# Altium PCB EthernetSwitchBoard.PcbDoc (part 2 of 2)
Units mil, origin at the board's own origin, x right, y up, seen from the top; angles counter-clockwise.
Board outline 5250 x 2500 mil, 4 copper layers (Top Layer, Ground Plane, Power Plane, Bottom Layer), stack 30.634 mil thick; 145 components, 168 nets, 574 pads, 171 vias.
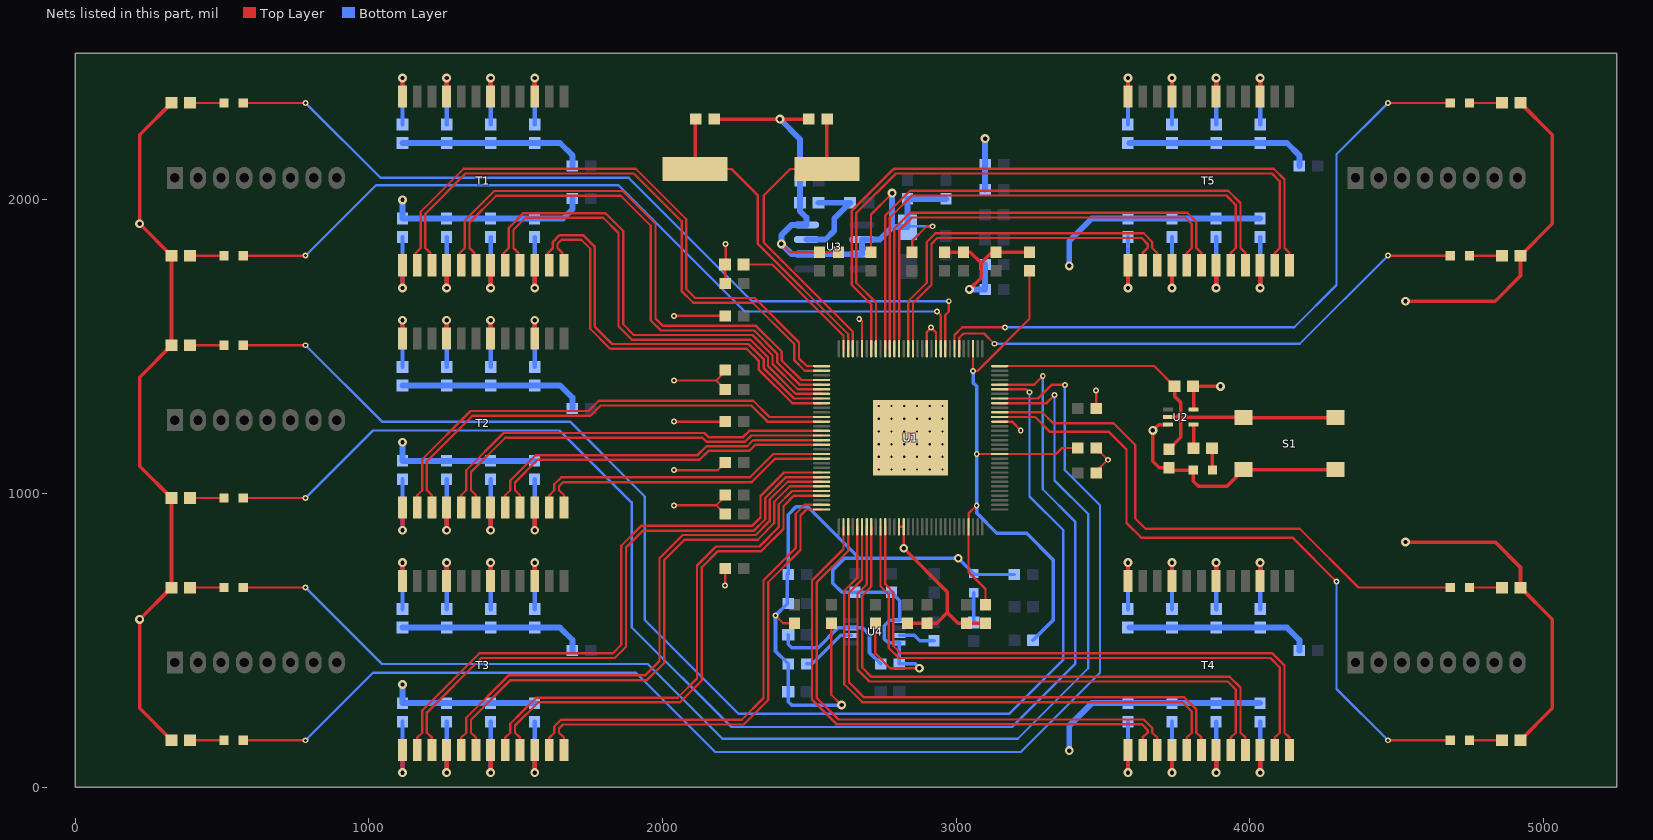
[diagram p4: the nets of this part, all layers, seen from the top]

## Via types
v1: diameter 30, hole 15, Top Layer to Bottom Layer, 75 vias
v2: diameter 20, hole 10, Top Layer to Bottom Layer, 56 vias
v3: diameter 19.68, hole 7.87, Top Layer to Bottom Layer, 36 vias
v4: diameter 200, hole 125, Top Layer to Bottom Layer, 4 vias

## Nets (pads, with @x,y where several pads share a name; then routed paths per layer and width w, separated by ;. In a path a pad name is that pad's centre, name@x,y a point inside that pad or via, vN(x,y) a via of type N, cw(c..) or ccw(c..) an arc to the next point about the centre after c; other vN are vias at no path point) (continued)
GND: C1.2 C2.2 C3.2 C4.1 C5.1 C6.1 C7.1 C8.1 C9.1 C10.1 C11.1 C14.1 C15.1 C16.1 C17.1 C18.1 C19.1 C20.1 C21.1 C22.1 C25.1 C26.1 C27.1 C28.1 C30.2 C31.2 C32.2 C33.2 C34.2 C35.2 C36.2 C37.2 C38.2 C39.2 C40.2 C41.2 C42.2 C43.2 C44.2 C45.2 C46.2 C47.2 C48.2 C49.2 C50.2 C51.2 C52.2 C53.2 C54.2 C55.2 C56.2 C57.2 C58.2 C59.2 C60.2 C61.2 C63.2 C64.2 C65.2 C66.2 C67.2 C68.2 C69.2 C70.2 C71.2 D1.A LED1.C LED12.C R3.1 R38.1 R39.2 S1.A U1.46 U1.47 U1.84 U1.107 U1.109 U1.123 U1.129 U2.3 U3.2 U3.4 U3.6 U3.7 U4.5 U4.8 | length 12734.5
  Top Layer w8: v2(2040,960) 2183.5,960 ; v2(2040,1080) 2188.5,1080 C35.2@2213.5,1105 ; v2(2040,1245) C36.2@2213.5,1245 ; v2(2040,1385) 2183.5,1385 ; v2(2040,1605) C37.2@2213.5,1605 ; v2(2213.5,686.5) C34.2@2213.5,745 ; C58.2@2213.5,930 2183.5,960 ; C47.2@2213.5,995 2213.5,990 2183.5,960 ; C59.2@2213.5,1355 2183.5,1385 ; C48.2@2213.5,1420 2213.5,1415 2183.5,1385 ; C49.2@2213.5,1715 R3.1@2213.5,1780 2215,1781.5 v2(2215,1850) ; v2(2385,585) 2411.5,558.5 C46.2@2450,558.5 ; v1(2405,1850) 2433.5,1821.5 C38.2@2535,1821.5 C50.2@2600,1821.5 ; C33.2@2575,558.5 2575,315 v1(2610,280) ; v2(2670,1595) 2679.65,1585.35 U1.123@2679.65,1493.15 ; C39.2@2710,1821.5 2710,1950 v1@2782.5,2022.5 ; C32.2@2725,558.5 2725,455 2775,405 v1(2875,405) ; U1.46@2805.63,886.85 U1.47@2821.38,886.85 v1(2821.38,813.62) ; C40.2@2850,1821.5 2850,1860 2900,1910 v2(2920,1910) ; U1.109@2900.12,1493.15 2900.12,1550.12 v2(2915,1565) 2931.61,1548.39 U1.107@2931.61,1493.15 ; U1.84@3148.15,1245.12 3189.88,1245.12 v2(3220,1215) ; C55.2@3476.5,1070 3476.5,1075 v2(3516.5,1115) C42.2@3476.5,1155 ; C54.2@3476.5,1290 v2(3476.5,1351.5)
  Top Layer w12: C3.2@2176.5,2275 v1(2400,2275) C2.2@2498.5,2275 ; v1(2821.38,813.62) 2970,665 2970,595 ; C45.2@2835,558.5 C57.2@2900,558.5 2933.5,558.5 2970,595 ; C51.2@2960,1821.5 C60.2@3025,1821.5 3048.5,1821.5 3085,1785 ; v1(3045,1695) 3085,1735 3085,1785 ; C43.2@3100,558.5 C56.2@3035,558.5 3006.5,558.5 2970,595 ; C41.2@3250,1821.5 C61.2@3135,1821.5 3121.5,1821.5 3085,1785 ; U2.3@3721.69,1234.41 3689.41,1234.41 v1(3670,1215) 3670,1110 3691.5,1088.5 C1.2@3725,1088.5 ; C1.2@3733.5,1080 LED1.C@3807.52,1080 3807.52,1042.48 3825,1025 3922.09,1025 S1.A@3978.5,1081.42 S1.A@4291.5,1081.42
  Bottom Layer w8: D1.A@2838,1910 v2(2920,1910)
  Bottom Layer w10: LED12.C@3062.48,725 C44.2@3198.5,725
  Bottom Layer w12: C69.2@2425,725 2425,625 v2(2385,585) 2385,463.5 C71.2@2428.5,420 R39.2@2428.5,325 2428.5,291.5 2440,280 v1(2610,280) ; C69.2@2428.5,725 2428.5,928.5 2455,955 2495,955 2670,780 ; U4.8@2806.5,490.22 C70.2@2806.5,420 2860,420 v1(2875,405) ; U4.8@2807.89,491.61 2768.39,491.61 2755,505 2755,550 2773.39,568.39 U4.5@2807.89,568.39 2807.89,635.61 C64.2@2780,663.5 C63.2@2655,663.5 2611.5,663.5 2580,695 2580,740 2620,780 2670,780 ; LED12.C@3060,727.48 v1(3007.48,780) 2670,780
  Bottom Layer w20: v1(1115,350) C15.1@1115,286.5 C17.1@1265,286.5 C19.1@1415,286.5 C21.1@1565,286.5 ; v1(1115,1175) C5.1@1115,1111.5 C7.1@1265,1111.5 C9.1@1415,1111.5 C11.1@1565,1111.5 ; v1(1115,2000) C4.1@1115,1936.5 C6.1@1265,1936.5 C8.1@1415,1936.5 C10.1@1565,1936.5 1661.5,1936.5 1693.5,1968.5 C14.1@1693.5,2005 ; v1(2400,2275) 2468.5,2206.5 C65.2@2468.5,2065 2468.5,1961.5 2490,1940 U3.4@2490,1915.51 ; U3.4@2490.51,1915 2440,1915 2405,1880 v1(2405,1850) 2440,1815 U3.2@2490.51,1815 U3.7@2679.49,1815 U3.6@2679.49,1865 2740,1865 2782,1907 ; v1(2782,2023) 2782,1907 ; C66.2@2965,2003.5 C67.2@2835,2003.5 D1.A@2835,1907 2782,1907 ; v1(3045,1695) C30.2@3098.5,1695 C31.2@3098.5,1780 ; C52.2@3098.5,2035 C53.2@3098.5,2120 v1(3098.5,2208.5) ; v1(3385,125) 3385,210 3461.5,286.5 C16.1@3585,286.5 C18.1@3735,286.5 C20.1@3885,286.5 C22.1@4035,286.5 ; v1(3385,1775) 3385,1860 3461.5,1936.5 C25.1@3585,1936.5 C26.1@3735,1936.5 C27.1@3885,1936.5 C28.1@4035,1936.5
  other v3: 2736.73,1081.73 2780.04,1081.73 2823.35,1081.73 2866.65,1081.73 2909.96,1081.73 2953.27,1081.73 2736.73,1125.04 2780.04,1125.04 2823.35,1125.04 2866.65,1125.04 2909.96,1125.04 2953.27,1125.04 2736.73,1168.35 2780.04,1168.35 2823.35,1168.35 2866.65,1168.35 2909.96,1168.35 2953.27,1168.35 2736.73,1211.65 2780.04,1211.65 2823.35,1211.65 2866.65,1211.65 2909.96,1211.65 2953.27,1211.65 2736.73,1254.96 2780.04,1254.96 2823.35,1254.96 2866.65,1254.96 2909.96,1254.96 2953.27,1254.96 2736.73,1298.27 2780.04,1298.27 2823.35,1298.27 2866.65,1298.27 2909.96,1298.27 2953.27,1298.27
ISET: R3.2 U1.127 | length 484.7
  Top Layer w8: R3.2@2276.5,1780 2373.79,1780 2616.65,1537.13 U1.127@2616.65,1493.15
KSZ_RESET_N: C1.1 R1.1 S1.B U1.96 U2.2 | length 1443.8
  Top Layer w8: U1.96@3148.15,1434.09 3674.41,1434.09 R1.1@3743.5,1365
  Top Layer w12: U2.2@3721.69,1260 3750,1260 ; C1.1@3725,1151.5 3765,1191.5 3765,1245 3750,1260 ; R1.1@3743.5,1365 3743.5,1331.5 3765,1310 3765,1275 3750,1260 ; S1.B@3977.09,1260 3750,1260 ; S1.B@3978.5,1258.58 S1.B@4291.5,1258.58
LED1_0: LED2.C U1.105 | length 2848.9
  Top Layer w8: LED2.C@572.48,2330 v2(785,2330) ; U1.105@2963.11,1493.15 2963.11,1608.11 2975,1620 v2(2975,1655)
  Bottom Layer w8: v2(785,2330) 1040,2075 1885,2075 2305,1655 v2(2975,1655)
LED1_1: LED4.C U1.106 | length 2772
  Top Layer w8: LED4.C@572.48,1810 v2(785,1810) ; v2(2935,1620) 2947.36,1607.64 U1.106@2947.36,1493.15
  Bottom Layer w8: v2(785,1810) 1025,2050 1850,2050 2280,1620 v2(2935,1620)
LED2_0: LED3.C U1.91 | length 4698.8
  Top Layer w8: LED3.C@572.48,1505 v2(785,1505) ; U1.91@3148.15,1355.35 3239.65,1355.35 v2(3250,1345)
  Bottom Layer w8: v2(785,1505) 1045,1245 1685,1245 1940,990 1940,570 2260,250 3180,250 3365,435 3365,875 3250,990 v2(3250,1345)
LED2_1: LED5.C U1.92 | length 4868.5
  Top Layer w8: LED5.C@572.48,985 v2(785,985) ; U1.92@3148.15,1371.1 3266.1,1371.1 v2(3295,1400)
  Bottom Layer w8: v2(785,985) 1015,1215 1650,1215 1895,970 1895,545 2235,205 3190,205 3405,420 3405,905 3295,1015 v2(3295,1400)
LED3_0: LED6.C U1.88 | length 4365.9
  Top Layer w8: LED6.C@572.48,680 v2(785,680) ; U1.88@3148.15,1308.11 3308.11,1308.11 v2(3335,1335)
  Bottom Layer w8: v2(785,680) 1045,420 1950,420 2205,165 3210,165 3450,405 3450,930 3335,1045 v2(3335,1335)
LED3_1: LED8.C U1.89 | length 4507.1
  Top Layer w8: LED8.C@572.48,160 v2(785,160) ; U1.89@3148.15,1323.86 3278.86,1323.86 3325,1370 v2(3370,1370)
  Bottom Layer w8: v2(785,160) 1015,390 1910,390 2180,120 3220,120 3490,390 3490,960 3370,1080 v2(3370,1370)
LED4_0: LED7.C U1.85 | length 2350.6
  Top Layer w8: U1.85@3148.15,1260.87 3269.13,1260.87 3320,1210 3520,1210 3580,1150 3580,900 3630,850 4145,850 v2(4295,700) ; v2(4470,160) LED7.C@4682.52,160
  Bottom Layer w8: v2(4295,700) 4295,335 v2(4470,160)
LED4_1: LED9.C U1.86 | length 1927.9
  Top Layer w8: U1.86@3148.15,1276.61 3293.39,1276.61 3330,1240 3535,1240 3610,1165 3610,915 3645,880 4170,880 4370,680 LED9.C@4682.52,680
LED5_0: LED10.C U1.102 | length 1854.2
  Top Layer w8: U1.102@3010.35,1493.15 3010.35,1530.35 3025,1545 3095,1545 v2(3130,1510) ; v2(4470,1810) LED10.C@4682.52,1810
  Bottom Layer w8: v2(3130,1510) 4170,1510 v2(4470,1810)
LED5_1: LED11.C U1.103 | length 2322.4
  Top Layer w8: U1.103@2994.61,1493.15 2994.61,1539.61 3021,1566 v2(3166,1566) ; v2(4470,2330) LED11.C@4682.52,2330
  Bottom Layer w8: v2(3166,1566) 4151,1566 4295,1710 4295,2155 v2(4470,2330)
NetC4_2: C4.2 T1.1 | length 250.9
  Top Layer w15: v1(1115,1700) T1.1@1115,1777.4
  Bottom Layer w15: v1(1115,1700) C4.2@1115,1873.5
NetC5_2: C5.2 T2.1 | length 250.9
  Top Layer w15: v1(1115,875) T2.1@1115,952.4
  Bottom Layer w15: v1(1115,875) C5.2@1115,1048.5
NetC6_2: C6.2 T1.4 | length 250.9
  Top Layer w15: v1(1265,1700) T1.4@1265,1777.4
  Bottom Layer w15: v1(1265,1700) C6.2@1265,1873.5
NetC7_2: C7.2 T2.4 | length 250.9
  Top Layer w15: v1(1265,875) T2.4@1265,952.4
  Bottom Layer w15: v1(1265,875) C7.2@1265,1048.5
NetC8_2: C8.2 T1.7 | length 250.9
  Top Layer w15: v1(1415,1700) T1.7@1415,1777.4
  Bottom Layer w15: v1(1415,1700) C8.2@1415,1873.5
NetC9_2: C9.2 T2.7 | length 250.9
  Top Layer w15: v1(1415,875) T2.7@1415,952.4
  Bottom Layer w15: v1(1415,875) C9.2@1415,1048.5
NetC10_2: C10.2 T1.10 | length 250.9
  Top Layer w15: v1(1565,1700) T1.10@1565,1777.4
  Bottom Layer w15: v1(1565,1700) C10.2@1565,1873.5
NetC11_2: C11.2 T2.10 | length 250.9
  Top Layer w15: v1(1565,875) T2.10@1565,952.4
  Bottom Layer w15: v1(1565,875) C11.2@1565,1048.5
NetC12_2: C12.2 R6.2 R8.2 R10.2 R12.2 | length 632.4
  Bottom Layer w20: R6.2@1115,2193.5 R8.2@1265,2193.5 R10.2@1415,2193.5 R12.2@1565,2193.5 1651.5,2193.5 1693.5,2151.5 C12.2@1693.5,2115
NetC13_2: C13.2 R7.2 R9.2 R11.2 R13.2 | length 632.4
  Bottom Layer w20: R7.2@1115,1368.5 R9.2@1265,1368.5 R11.2@1415,1368.5 R13.2@1565,1368.5 1651.5,1368.5 1693.5,1326.5 C13.2@1693.5,1290
NetC15_2: C15.2 T3.1 | length 250.9
  Top Layer w15: v1(1115,50) T3.1@1115,127.4
  Bottom Layer w15: v1(1115,50) C15.2@1115,223.5
NetC16_2: C16.2 T4.1 | length 250.9
  Top Layer w15: v1(3585,50) T4.1@3585,127.4
  Bottom Layer w15: v1(3585,50) C16.2@3585,223.5
NetC17_2: C17.2 T3.4 | length 250.9
  Top Layer w15: v1(1265,50) T3.4@1265,127.4
  Bottom Layer w15: v1(1265,50) C17.2@1265,223.5
NetC18_2: C18.2 T4.4 | length 250.9
  Top Layer w15: v1(3735,50) T4.4@3735,127.4
  Bottom Layer w15: v1(3735,50) C18.2@3735,223.5
NetC19_2: C19.2 T3.7 | length 250.9
  Top Layer w15: v1(1415,50) T3.7@1415,127.4
  Bottom Layer w15: v1(1415,50) C19.2@1415,223.5
NetC20_2: C20.2 T4.7 | length 250.9
  Top Layer w15: v1(3885,50) T4.7@3885,127.4
  Bottom Layer w15: v1(3885,50) C20.2@3885,223.5
NetC21_2: C21.2 T3.10 | length 250.9
  Top Layer w15: v1(1565,50) T3.10@1565,127.4
  Bottom Layer w15: v1(1565,50) C21.2@1565,223.5
NetC22_2: C22.2 T4.10 | length 250.9
  Top Layer w15: v1(4035,50) T4.10@4035,127.4
  Bottom Layer w15: v1(4035,50) C22.2@4035,223.5
NetC23_2: C23.2 R18.2 R20.2 R22.2 R24.2 | length 632.4
  Bottom Layer w20: R18.2@1115,543.5 R20.2@1265,543.5 R22.2@1415,543.5 R24.2@1565,543.5 1651.5,543.5 1693.5,501.5 C23.2@1693.5,465
NetC24_2: C24.2 R19.2 R21.2 R23.2 R25.2 | length 632.4
  Bottom Layer w20: R19.2@3590,543.5 3740,543.5 3890,543.5 4040,543.5 4126.5,543.5 4168.5,501.5 C24.2@4168.5,465
NetC25_2: C25.2 T5.1 | length 250.9
  Top Layer w15: v1(3585,1700) T5.1@3585,1777.4
  Bottom Layer w15: v1(3585,1700) C25.2@3585,1873.5
NetC26_2: C26.2 T5.4 | length 250.9
  Top Layer w15: v1(3735,1700) T5.4@3735,1777.4
  Bottom Layer w15: v1(3735,1700) C26.2@3735,1873.5
NetC27_2: C27.2 T5.7 | length 250.9
  Top Layer w15: v1(3885,1700) T5.7@3885,1777.4
  Bottom Layer w15: v1(3885,1700) C27.2@3885,1873.5
NetC28_2: C28.2 T5.10 | length 250.9
  Top Layer w15: v1(4035,1700) T5.10@4035,1777.4
  Bottom Layer w15: v1(4035,1700) C28.2@4035,1873.5
NetC29_2: C29.2 R29.2 R30.2 R31.2 R32.2 | length 632.4
  Bottom Layer w20: R29.2@3590,2193.5 3740,2193.5 3890,2193.5 4040,2193.5 4126.5,2193.5 4168.5,2151.5 C29.2@4168.5,2115
NetC62_1: C62.1 U4.7 | length 124.9
  Bottom Layer w12: U4.7@2807.89,517.2 2857.8,517.2 2876.5,498.5 C62.1@2925,498.5
NetC70_1: C70.1 R37.1 U4.3 | length 468.2
  Bottom Layer w12: R37.1@2428.5,520 2428.5,486.5 2440,475 2530,475 2597.8,542.8 U4.3@2642.11,542.8 2682.2,542.8 2705,520 2705,458.5 C70.1@2743.5,420
NetLED1_A: LED1.A R2.2 | length 74
  Top Layer w12: LED1.A@3872.48,1080 R2.2@3872.48,1154.02
NetLED2_A: LED2.A R4.2 | length 116
  Top Layer w8: R4.2@391.5,2330 LED2.A@507.52,2330
NetLED3_A: LED3.A R5.2 | length 116
  Top Layer w8: R5.2@391.5,1505 LED3.A@507.52,1505
NetLED4_A: LED4.A R14.2 | length 116
  Top Layer w8: R14.2@391.5,1810 LED4.A@507.52,1810
NetLED5_A: LED5.A R15.2 | length 116
  Top Layer w8: R15.2@391.5,985 LED5.A@507.52,985
NetLED6_A: LED6.A R16.2 | length 116
  Top Layer w8: R16.2@391.5,680 LED6.A@507.52,680
NetLED7_A: LED7.A R17.2 | length 111
  Top Layer w8: LED7.A@4747.48,160 R17.2@4858.5,160
NetLED8_A: LED8.A R26.2 | length 116
  Top Layer w8: R26.2@391.5,160 LED8.A@507.52,160
NetLED9_A: LED9.A R27.2 | length 111
  Top Layer w8: LED9.A@4747.48,680 R27.2@4858.5,680
NetLED10_A: LED10.A R28.2 | length 111
  Top Layer w8: LED10.A@4747.48,1810 R28.2@4858.5,1810
NetLED11_A: LED11.A R33.2 | length 111
  Top Layer w8: LED11.A@4747.48,2330 R33.2@4858.5,2330
NetLED12_A: LED12.A R35.2 | length 101
  Bottom Layer w12: R35.2@3060,561.5 LED12.A@3060,662.52
NetR2_1: R2.1 U2.4 | length 79.2
  Top Layer w12: R2.1@3808.31,1155.2 U2.4@3808.31,1234.41
NetR6_1: R6.1 T1.24 | length 220.9
  Top Layer w15: T1.24@1115,2352.6 v1(1115,2415)
  Bottom Layer w15: R6.1@1115,2256.5 v1(1115,2415)
NetR7_1: R7.1 T2.24 | length 220.9
  Top Layer w15: T2.24@1115,1527.6 v1(1115,1590)
  Bottom Layer w15: R7.1@1115,1431.5 v1(1115,1590)
NetR8_1: R8.1 T1.21 | length 220.9
  Top Layer w15: T1.21@1265,2352.6 v1(1265,2415)
  Bottom Layer w15: R8.1@1265,2256.5 v1(1265,2415)
NetR9_1: R9.1 T2.21 | length 220.9
  Top Layer w15: T2.21@1265,1527.6 v1(1265,1590)
  Bottom Layer w15: R9.1@1265,1431.5 v1(1265,1590)
NetR10_1: R10.1 T1.18 | length 220.9
  Top Layer w15: T1.18@1415,2352.6 v1(1415,2415)
  Bottom Layer w15: R10.1@1415,2256.5 v1(1415,2415)
NetR11_1: R11.1 T2.18 | length 220.9
  Top Layer w15: T2.18@1415,1527.6 v1(1415,1590)
  Bottom Layer w15: R11.1@1415,1431.5 v1(1415,1590)
NetR12_1: R12.1 T1.15 | length 220.9
  Top Layer w15: T1.15@1565,2352.6 v1(1565,2415)
  Bottom Layer w15: R12.1@1565,2256.5 v1(1565,2415)
NetR13_1: R13.1 T2.15 | length 220.9
  Top Layer w15: T2.15@1565,1527.6 v1(1565,1590)
  Bottom Layer w15: R13.1@1565,1431.5 v1(1565,1590)
NetR18_1: R18.1 T3.24 | length 220.9
  Top Layer w15: T3.24@1115,702.6 v1(1115,765)
  Bottom Layer w15: R18.1@1115,606.5 v1(1115,765)
NetR19_1: R19.1 T4.24 | length 220.9
  Top Layer w15: T4.24@3585,702.6 v1(3585,765)
  Bottom Layer w15: R19.1@3585,606.5 v1(3585,765)
NetR20_1: R20.1 T3.21 | length 220.9
  Top Layer w15: T3.21@1265,702.6 v1(1265,765)
  Bottom Layer w15: R20.1@1265,606.5 v1(1265,765)
NetR21_1: R21.1 T4.21 | length 220.9
  Top Layer w15: T4.21@3735,702.6 v1(3735,765)
  Bottom Layer w15: R21.1@3735,606.5 v1(3735,765)
NetR22_1: R22.1 T3.18 | length 220.9
  Top Layer w15: T3.18@1415,702.6 v1(1415,765)
  Bottom Layer w15: R22.1@1415,606.5 v1(1415,765)
NetR23_1: R23.1 T4.18 | length 220.9
  Top Layer w15: T4.18@3885,702.6 v1(3885,765)
  Bottom Layer w15: R23.1@3885,606.5 v1(3885,765)
NetR24_1: R24.1 T3.15 | length 220.9
  Top Layer w15: T3.15@1565,702.6 v1(1565,765)
  Bottom Layer w15: R24.1@1565,606.5 v1(1565,765)
NetR25_1: R25.1 T4.15 | length 220.9
  Top Layer w15: T4.15@4035,702.6 v1(4035,765)
  Bottom Layer w15: R25.1@4035,606.5 v1(4035,765)
NetR29_1: R29.1 T5.24 | length 220.9
  Top Layer w15: T5.24@3585,2352.6 v1(3585,2415)
  Bottom Layer w15: R29.1@3585,2256.5 v1(3585,2415)
NetR30_1: R30.1 T5.21 | length 220.9
  Top Layer w15: T5.21@3735,2352.6 v1(3735,2415)
  Bottom Layer w15: R30.1@3735,2256.5 v1(3735,2415)
NetR31_1: R31.1 T5.18 | length 220.9
  Top Layer w15: T5.18@3885,2352.6 v1(3885,2415)
  Bottom Layer w15: R31.1@3885,2256.5 v1(3885,2415)
NetR32_1: R32.1 T5.15 | length 220.9
  Top Layer w15: T5.15@4035,2352.6 v1(4035,2415)
  Bottom Layer w15: R32.1@4035,2256.5 v1(4035,2415)
NetR36_1: R36.1 R38.2 U3.3 | length 331.1
  Bottom Layer w20: U3.3@2490.51,1865 2555,1865 2585,1895 2585,1936.5 R36.1@2638.5,1990 R38.2@2531.5,1990
P1_TXRXA_N: T1.3 U1.2 | length 2037.5
  Top Layer w8: T1.3@1210,1777.4 1210,1819 1193,1836 1193,1953 1330,2090 1902.37,2090 2065.31,1927.06 2065.31,1689.69 2105,1650 2307.37,1650 2449.17,1508.2 2449.17,1453.54 2484.36,1418.35 U1.2@2541.85,1418.35
P1_TXRXA_P: T1.2 U1.1 | length 2064.1
  Top Layer w8: T1.2@1160,1777.4 1160,1819 1177,1836 1177,1959.63 1323.37,2106 1909,2106 2081.31,1933.69 2081.31,1696.31 2111.63,1666 2314,1666 2465.17,1514.83 2465.17,1460.17 2491.24,1434.09 U1.1@2541.85,1434.09
P1_TXRXB_N: T1.6 U1.5 | length 1861.9
  Top Layer w8: T1.6@1360,1777.4 1360,1819 1343,1836 1343,1923 1434,2014 1858.37,2014 1960.31,1912.06 1960.31,1589.69 1995,1555 2312.37,1555 2390.5,1476.88 2390.5,1446.88 2466.27,1371.1 U1.5@2541.85,1371.1
P1_TXRXB_P: T1.5 U1.4 | length 1888.5
  Top Layer w8: T1.5@1310,1777.4 1310,1819 1327,1836 1327,1929.63 1427.37,2030 1865,2030 1976.31,1918.69 1976.31,1596.31 2001.63,1571 2319,1571 2406.5,1483.5 2406.5,1453.5 2473.15,1386.85 U1.4@2541.85,1386.85
P1_TXRXC_N: T1.9 U1.7 | length 1645.4
  Top Layer w8: T1.9@1510,1777.4 1510,1819 1493,1836 1493,1898 1534,1939 1798.37,1939 1850.31,1887.06 1850.31,1569.69 1896,1524 2299.53,1524 2359.5,1464.04 2359.5,1434.04 2454.18,1339.35 2541.6,1339.35 U1.7@2541.85,1339.61
P1_TXRXC_P: T1.8 U1.6 | length 1671.9
  Top Layer w8: T1.8@1460,1777.4 1460,1819 1477,1836 1477,1904.63 1527.37,1955 1805,1955 1866.31,1893.69 1866.31,1576.31 1902.63,1540 2306.16,1540 2375,1471.16 2375,1441.16 2460.81,1355.35 U1.6@2541.85,1355.35
P1_TXRXD_N: T1.12 U1.9 | length 1392.1
  Top Layer w8: T1.12@1660,1777.4 1660,1819 1643,1836 1643,1850.37 1656.63,1864 1723.37,1864 1754,1833.37 1754,1561 1822,1493 2286.69,1493 2328.5,1451.2 2328.5,1421.2 2441.83,1307.86 2541.6,1307.86 U1.9@2541.85,1308.11
P1_TXRXD_P: T1.11 U1.8 | length 1418.5
  Top Layer w8: T1.11@1610,1777.4 1610,1819 1627,1836 1627,1857 1650,1880 1730,1880 1770,1840 1770,1567.63 1828.63,1509 2293.32,1509 2344.5,1457.82 2344.5,1427.82 2448.46,1323.86 U1.8@2541.85,1323.86
P2_TXRXA_N: T2.3 U1.13 | length 1624.9
  Top Layer w8: T2.3@1215,937.4 T2.3@1215,952.4 1215,994 1198,1011 1198,1110 1353,1265 1755,1265 1790,1300 2302.37,1300 2357.25,1245.12 U1.13@2541.85,1245.12
P2_TXRXA_P: T2.2 U1.12 | length 1651.5
  Top Layer w8: T2.2@1165,937.4 T2.2@1165,952.4 1165,994 1182,1011 1182,1116.63 1346.37,1281 1748.37,1281 1783.37,1316 2309,1316 2364.13,1260.87 U1.12@2541.85,1260.87
P2_TXRXB_N: T2.6 U1.16 | length 1399.6
  Top Layer w8: T2.6@1365,937.4 T2.6@1365,952.4 1365,994 1348,1011 1348,1073 1465,1190 2136.31,1190 2150,1176.31 2281.31,1176.31 2302.87,1197.87 U1.16@2541.85,1197.87
P2_TXRXB_P: T2.5 U1.15 | length 1426
  Top Layer w8: T2.5@1315,937.4 T2.5@1315,952.4 1315,994 1332,1011 1332,1079.63 1458.37,1206 2142.94,1206 2147.94,1201 2156.63,1192.31 2274.69,1192.31 2295.99,1213.62 U1.15@2541.85,1213.62
P2_TXRXC_N: T2.9 U1.18 | length 1204.7
  Top Layer w8: T2.9@1515,937.4 T2.9@1515,952.4 1515,994 1498,1011 1498,1038 1575,1115 2126.31,1115 2156.63,1145.31 2295.31,1145.31 2316.38,1166.38 U1.18@2541.85,1166.38
P2_TXRXC_P: T2.8 U1.17 | length 1231.1
  Top Layer w8: T2.8@1465,937.4 T2.8@1465,952.4 1465,994 1482,1011 1482,1044.63 1568.37,1131 2119.69,1131 2150,1161.31 2288.69,1161.31 2309.5,1182.13 U1.17@2541.85,1182.13
P2_TXRXD_N: T2.12 U1.21 | length 1012.5
  Top Layer w8: T2.12@1665,952.4 1665,994 1648,1011 1648,1025 1662,1039 2304,1039 2384.13,1119.13 U1.21@2541.85,1119.13
P2_TXRXD_P: T2.11 U1.20 | length 1038.9
  Top Layer w8: T2.11@1615,952.4 1615,994 1632,1011 1632,1031.63 1655.37,1055 2297.37,1055 2377.25,1134.88 U1.20@2541.85,1134.88
P3_TXRXA_N: T3.3 U1.25 | length 2050.7
  Top Layer w8: T3.3@1215,127.4 1215,169 1198,186 1198,255 1383,440 1837.63,440 1876,478.37 1876,816 1934,874 2311.63,874 2350,912.37 2350,985 2421.14,1056.14 U1.25@2541.85,1056.14
P3_TXRXA_P: T3.2 U1.24 | length 2077.1
  Top Layer w8: T3.2@1165,127.4 1165,169 1182,186 1182,261.63 1376.37,456 1831,456 1860,485 1860,822.63 1927.37,890 2305,890 2334,919 2334,991.63 2414.26,1071.89 U1.24@2541.85,1071.89
P3_TXRXB_N: T3.6 U1.27 | length 1880.2
  Top Layer w8: T3.6@1365,127.4 1365,169 1348,186 1348,230 1483,365 1947.63,365 2006,423.37 2006,773.37 2075.63,843 2324.47,843 2381,899.53 2381,972.16 2433.49,1024.65 U1.27@2541.85,1024.65
P3_TXRXB_P: T3.5 U1.26 | length 1906.6
  Top Layer w8: T3.5@1315,127.4 1315,169 1332,186 1332,236.63 1476.37,381 1941,381 1990,430 1990,780 2069,859 2317.84,859 2365,906.16 2365,978.79 2426.61,1040.39 U1.26@2541.85,1040.39
P3_TXRXC_N: T3.9 U1.29 | length 1728.9
  Top Layer w8: T3.9@1515,127.4 1515,169 1498,186 1498,210 1577,289 2059,289 2133.69,363.69 2133.69,748.69 2189,804 2336.63,804 2412,879.37 2412,957 2448.15,993.15 U1.29@2541.85,993.15
P3_TXRXC_P: T3.8 U1.28 | length 1755.3
  Top Layer w8: T3.8@1465,127.4 1465,169 1482,186 1482,216.63 1522,256.63 1570.37,305 2052.37,305 2117.69,370.31 2117.69,755.31 2182.37,820 2330,820 2396,886 2396,963.63 2441.27,1008.9 U1.28@2541.85,1008.9
P3_TXRXD_N: T3.12 U1.32 | length 1585.9
  Top Layer w8: T3.12@1665,127.4 1665,169 1648,186 1648,200.37 1661.63,214 2276.63,214 2360,297.37 2360,402.37 2360,698.37 2470,808.37 2470,925 2490.91,945.91 U1.32@2541.85,945.91
P3_TXRXD_P: T3.11 U1.31 | length 1612.3
  Top Layer w8: T3.11@1615,127.4 1615,169 1632,186 1632,207 1655,230 2270,230 2344,304 2344,705 2454,815 2454,931.63 2484.03,961.65 U1.31@2541.85,961.65
P4_TXRXA_N: T4.3 U1.35 | length 1893.4
  Top Layer w8: U1.35@2632.4,886.85 2632.4,804.77 2525,697.37 2525,305 2599,231 3638.63,231 3668,201.63 3668,186 3685,169 T4.3@3685,127.4
P4_TXRXA_P: T4.2 U1.34 | length 1893.5
  Top Layer w8: U1.34@2616.65,886.85 2616.65,811.65 2509,704 2509,298.37 2592.37,215 3632,215 3652,195 3652,186 3635,169 T4.2@3635,127.4
P4_TXRXB_N: T4.6 U1.38 | length 1913.5
  Top Layer w8: U1.38@2679.65,886.85 2679.65,707.02 2635,662.37 2635,357.63 2686.63,306 3776.63,306 3818,264.63 3818,186 3835,169 T4.6@3835,127.4
P4_TXRXB_P: T4.5 U1.37 | length 1913.6
  Top Layer w8: U1.37@2663.9,886.85 2663.9,713.9 2619,669 2619,351 2680,290 3770,290 3802,258 3802,186 3785,169 T4.5@3785,127.4
P4_TXRXC_N: T4.9 U1.40 | length 2027.6
  Top Layer w8: U1.40@2711.14,886.85 2711.14,683.51 2680,652.37 2680,407.63 2711.63,376 3931.63,376 3968,339.63 3968,186 3985,169 T4.9@3985,127.4
P4_TXRXC_P: T4.8 U1.39 | length 2027.7
  Top Layer w8: U1.39@2695.39,886.85 2695.39,690.39 2664,659 2664,401 2705,360 3925,360 3952,333 3952,186 3935,169 T4.8@3935,127.4
P4_TXRXD_N: T4.12 U1.43 | length 2070.7
  Top Layer w8: U1.43@2758.39,886.85 2758.39,691.61 2786,664 2786,481.63 2811.63,456 4076.63,456 4118,414.63 4118,186 4135,169 T4.12@4135,127.4
P4_TXRXD_P: T4.11 U1.42 | length 2070.6
  Top Layer w8: U1.42@2742.64,886.85 2742.64,684.73 2770,657.37 2770,475 2805,440 4070,440 4102,408 4102,186 4085,169 T4.11@4085,127.4
P5_TXRXA_N: T5.3 U1.113 | length 1268.1
  Top Layer w8: U1.113@2837.13,1493.15 2837.13,1654.75 2900,1717.63 2900,1856.63 2929.37,1886 3638.63,1886 3668,1856.63 3668,1836 3685,1819 T5.3@3685,1777.4
P5_TXRXA_P: T5.2 U1.112 | length 1215.2
  Top Layer w8: U1.112@2852.87,1493.15 2852.87,1647.87 2916,1711 2916,1850 2936,1870 3632,1870 3652,1850 3652,1836 3635,1819 T5.2@3635,1777.4
P5_TXRXB_N: T5.6 U1.116 | length 1627
  Top Layer w8: U1.116@2789.88,1493.15 2789.88,1526.68 2789.76,1526.8 2789.76,1902.38 2843.37,1956 3786.63,1956 3818,1924.63 3818,1836 3835,1819 T5.6@3835,1777.4
P5_TXRXB_P: T5.5 U1.115 | length 1574
  Top Layer w8: U1.115@2805.63,1493.15 2805.63,1526.68 2805.76,1526.8 2805.76,1895.76 2850,1940 3780,1940 3802,1918 3802,1836 3785,1819 T5.5@3785,1777.4
P5_TXRXC_N: T5.9 U1.118 | length 1934.2
  Top Layer w8: U1.118@2758.39,1493.15 2758.39,1526.68 2758.26,1526.8 2758.26,1945.89 2843.37,2031 3926.63,2031 3968,1989.63 3968,1836 3985,1819 T5.9@3985,1777.4
P5_TXRXC_P: T5.8 U1.117 | length 1881.2
  Top Layer w8: U1.117@2774.13,1493.15 2774.13,1526.68 2774.26,1526.8 2774.26,1939.26 2850,2015 3920,2015 3952,1983 3952,1836 3935,1819 T5.8@3935,1777.4
P5_TXRXD_N: T5.12 U1.121 | length 2344.4
  Top Layer w8: U1.121@2711.14,1493.15 2711.14,1643.86 2644,1711 2644,1961.63 2783.69,2101.31 2788.37,2106 4081.63,2106 4118,2069.63 4118,1836 4135,1819 T5.12@4135,1777.4
P5_TXRXD_P: T5.11 U1.120 | length 2291.3
  Top Layer w8: U1.120@2726.89,1493.15 2726.89,1650.74 2660,1717.63 2660,1955 2795,2090 4075,2090 4102,2063 4102,1836 4085,1819 T5.11@4085,1777.4
VCC2: C71.1 U4.2 | length 190.9
  Bottom Layer w12: C71.1@2491.5,420 2510,420 2607.2,517.2 U4.2@2642.11,517.2
"VDDIO 2V5": C41.1 C42.1 C43.1 FB2.1 R1.2 R4.1 R5.1 R14.1 R15.1 R16.1 R17.1 R26.1 R27.1 R28.1 R33.1 U1.61 U1.77 U1.99 U2.5 | length 7171.4
  Top Layer w8: U1.99@3057.6,1493.15 v2(3057.6,1417.4) 3072.4,1417.4 3250,1595 C41.1@3250,1758.5 ; v2(3070,960) 3042.58,932.58 3042.58,887.58 U1.61@3041.85,886.85 3041.85,733.15 3100,675 C43.1@3100,621.5 ; v2(3070.12,1134.88) U1.77@3148.15,1134.88 3339.88,1134.88 3360,1155 C42.1@3413.5,1155
  Top Layer w12: R26.1@328.5,160 220,268.5 v1(220,571.5) R16.1@328.5,680 R15.1@328.5,985 220,1093.5 220,1396.5 R5.1@328.5,1505 R14.1@328.5,1810 v1(220,1918.5) 220,2221.5 R4.1@328.5,2330 ; R1.2@3806.5,1365 v1(3900,1365) ; U2.5@3808.31,1285.59 R1.2@3808.31,1363.19 ; v1(4530,835) 4835,835 4921.5,748.5 R27.1@4921.5,680 5030,571.5 5030,268.5 R17.1@4921.5,160 ; v1(4530,1655) 4835,1655 4921.5,1741.5 R28.1@4921.5,1810 5030,1918.5 5030,2221.5 R33.1@4921.5,2330
  Bottom Layer w12: v2(3057.6,1417.4) 3057.6,1377.4 3070.12,1364.88 v2(3070.12,1134.88) 3070.12,990.12 3070,990 v2(3070,960) 3070,933.7 3138.7,865 3240,865 3330,775 3330,568.5 FB2.1@3261.5,500
XI: C3.1 U1.126 Y1.2 | length 1068
  Top Layer w8: Y1.2@2111.18,2105 2235,2105 2325,2015 2325,1850 2632.4,1542.6 U1.126@2632.4,1493.15
  Top Layer w12: Y1.2@2111.18,2105 C3.1@2111.18,2272.68
XO: C2.1 U1.125 Y1.1 | length 1068.2
  Top Layer w8: Y1.1@2560,2105 2435,2105 2345,2015 2345,1855 2648.15,1551.85 U1.125@2648.15,1493.15
  Top Layer w12: Y1.1@2560,2105 C2.1@2560,2273.5
pads on no net: U1.48 U1.49 U1.50 U1.51 U1.52 U1.53 U1.54 U1.55 U1.57 U1.58 U1.59 U1.60 U1.62 U1.63 U1.64 U1.65 U1.66 U1.67 U1.68 U1.69 U1.70 U1.71 U1.72 U1.73 U1.75 U1.76 U1.78 U1.79 U1.80 U1.81 U1.82 U1.83 U1.90 U1.93 U1.94 U1.95 U1.97 U1.98 U1.100 U1.101 U1.108 U2.1
copper on no net:
  other v4: 150,150 5100,150 150,2350 5100,2350

## Polygon pours and split planes (outlines as drawn)
EARTH_ETH on Ground Plane (split plane): 1984.9,2157.89 1984.9,552.11 1862.89,430.1 1747.11,430.1 1625.1,552.11 1625.1,2157.89 1732.11,2264.9 1877.89,2264.9
EARTH_ETH on Ground Plane (split plane): 4409.9,1947.89 4409.9,342.11 4302.89,235.1 4157.11,235.1 4050.1,342.11 4050.1,1947.89 4172.11,2069.9 4287.89,2069.9
GND on Ground Plane (split plane): 5229.9,20.1 20.1,20.1 20.1,2479.9 5229.9,2479.9
5V on Power Plane (split plane): 5229.9,20.1 3182.11,20.1 2415.1,787.11 2415.1,872.89 2472.11,929.9 2562.89,929.9 3271.4,221.4 3273.05,220.29 3275,219.9 4325,219.9 4326.95,220.29 4328.6,221.4 4583.6,476.4 4584.71,478.05 4585.1,480 4585.1,1950 4584.71,1951.95 4583.6,1953.6 4278.6,2258.6 4276.95,2259.71 4275,2260.1 2990,2260.1 2988.05,2259.71 2986.4,2258.6 2837.89,2110.1 2667.11,2110.1 2585.1,2192.11 2585.1,2292.89 2772.11,2479.9 5229.9,2479.9
"VDDIO 2V5" on Power Plane (split plane): 2576.4,2298.6 2575.29,2296.95 2574.9,2295 2574.9,2190 2575.29,2188.05 2576.4,2186.4 2661.4,2101.4 2663.05,2100.29 2665,2099.9 2840,2099.9 2841.95,2100.29 2843.6,2101.4 2992.11,2249.9 4272.89,2249.9 4574.9,1947.89 4574.9,482.11 4322.89,230.1 3277.11,230.1 2568.6,938.6 2566.95,939.71 2565,940.1 2470,940.1 2468.05,939.71 2466.4,938.6 2406.4,878.6 2405.29,876.95 2404.9,875 2404.9,785 2405.29,783.05 2406.4,781.4 3167.69,20.1 20.1,20.1 20.1,2479.9 2757.69,2479.9

## Keep-outs
Keep-Out Layer:
  the board outline again, w10

## Other copper
Ground Plane (plane layer: these items are gaps in the copper):
  lines w10: 1620,550 1745,425 1865,425 1990,550 1990,2160 1880,2270 1730,2270 1620,2160 1620,550 ; 4045,340 4045,1950 4170,2075 4290,2075 4415,1950 4415,340 4305,230 4155,230 4045,340
Power Plane (plane layer: these items are gaps in the copper):
  lines w10: 2785,2500 2580,2295 2580,2190 2665,2105 2840,2105 2990,2255 4275,2255 4580,1950 4580,480 4325,225 3275,225 2565,935 2470,935 2410,875 2410,785 3197.5,-2.5

## Dimensions
0,0 to 5100,150 on Mechanical 15
0,0 to 150,150 on Mechanical 15
0,0 to 150,150 on Mechanical 15
0,0 to 0,2500 on Mechanical 15
0,0 to 150,2350 on Mechanical 15
0,0 to 5250,0 on Mechanical 15